# Altium PCB DC48V_DC24V_200W_V2.0.PcbDoc
Units mm, origin at the board's own origin, x right, y up, seen from the top; angles counter-clockwise.
Board outline 70 x 50 mm, 2 copper layers (Top Layer, Bottom Layer); 17 components, 6 nets, 53 pads, 20 vias.
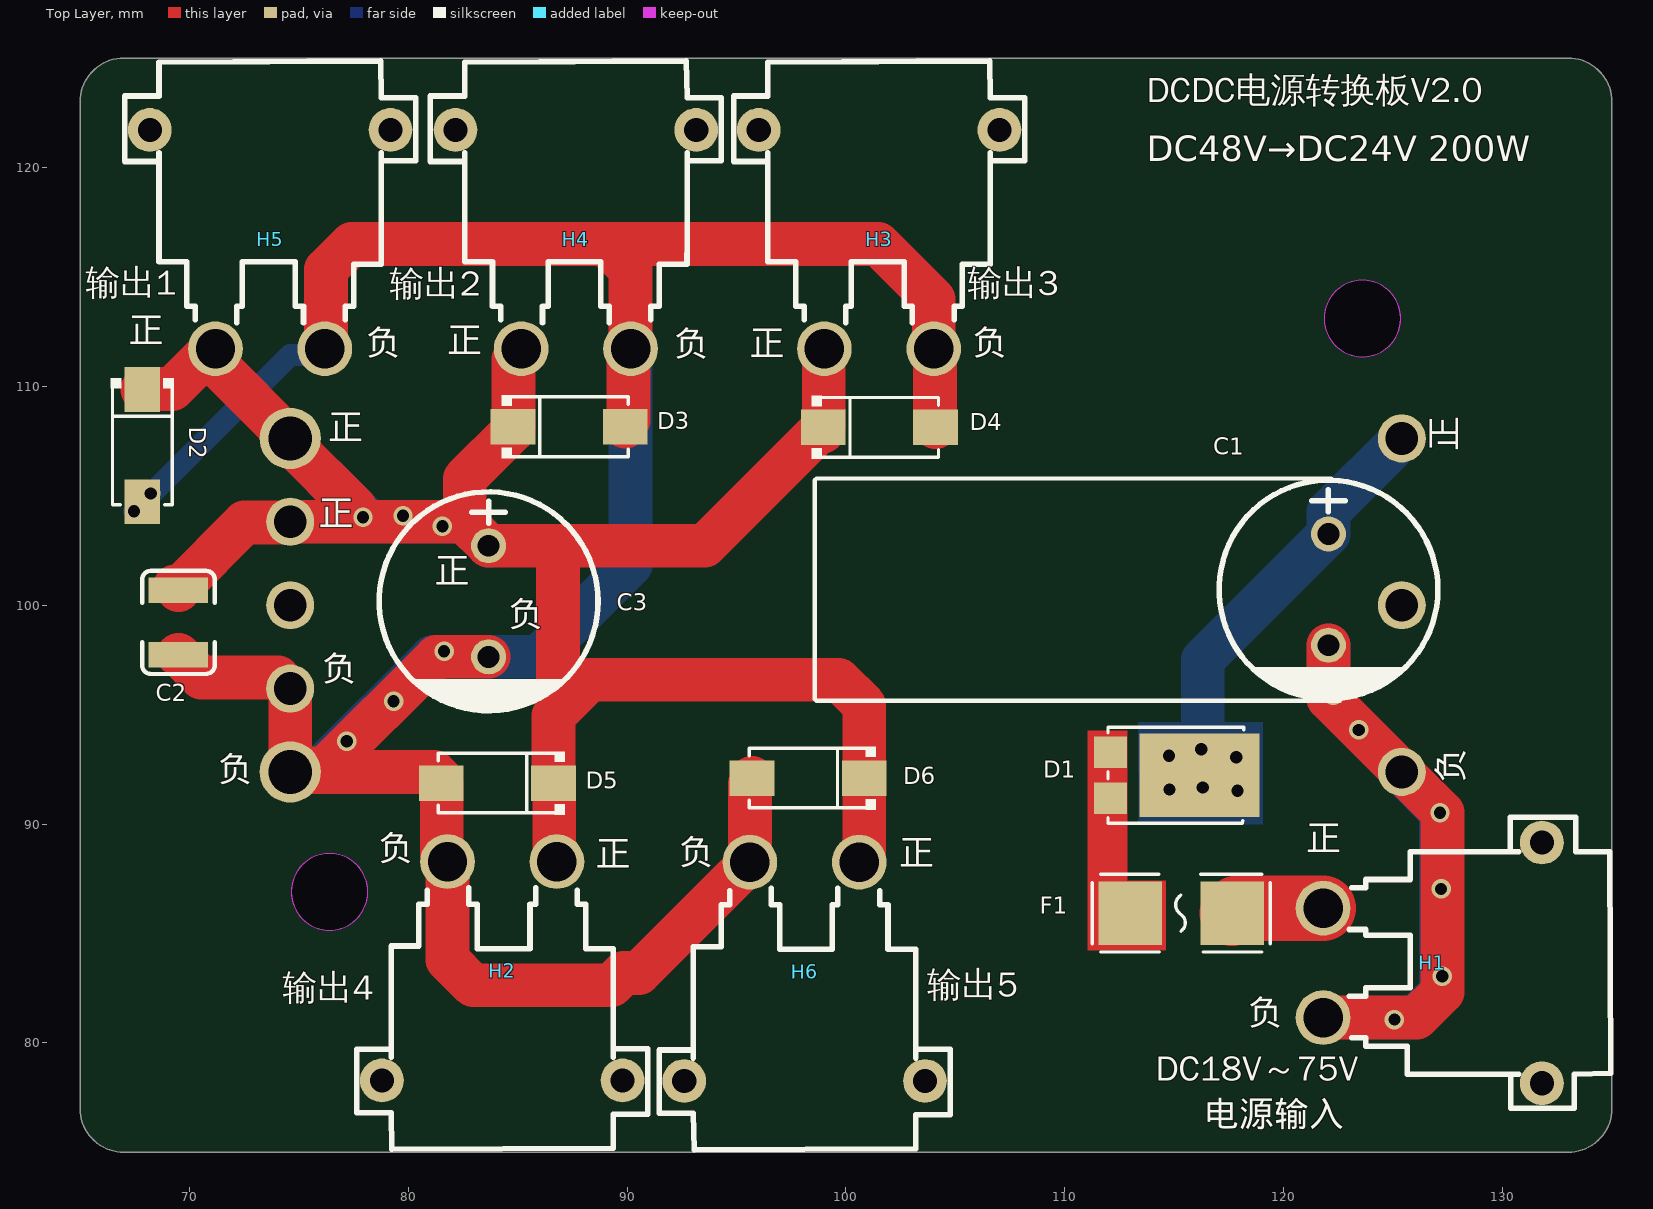
[diagram p0: Top Layer view]
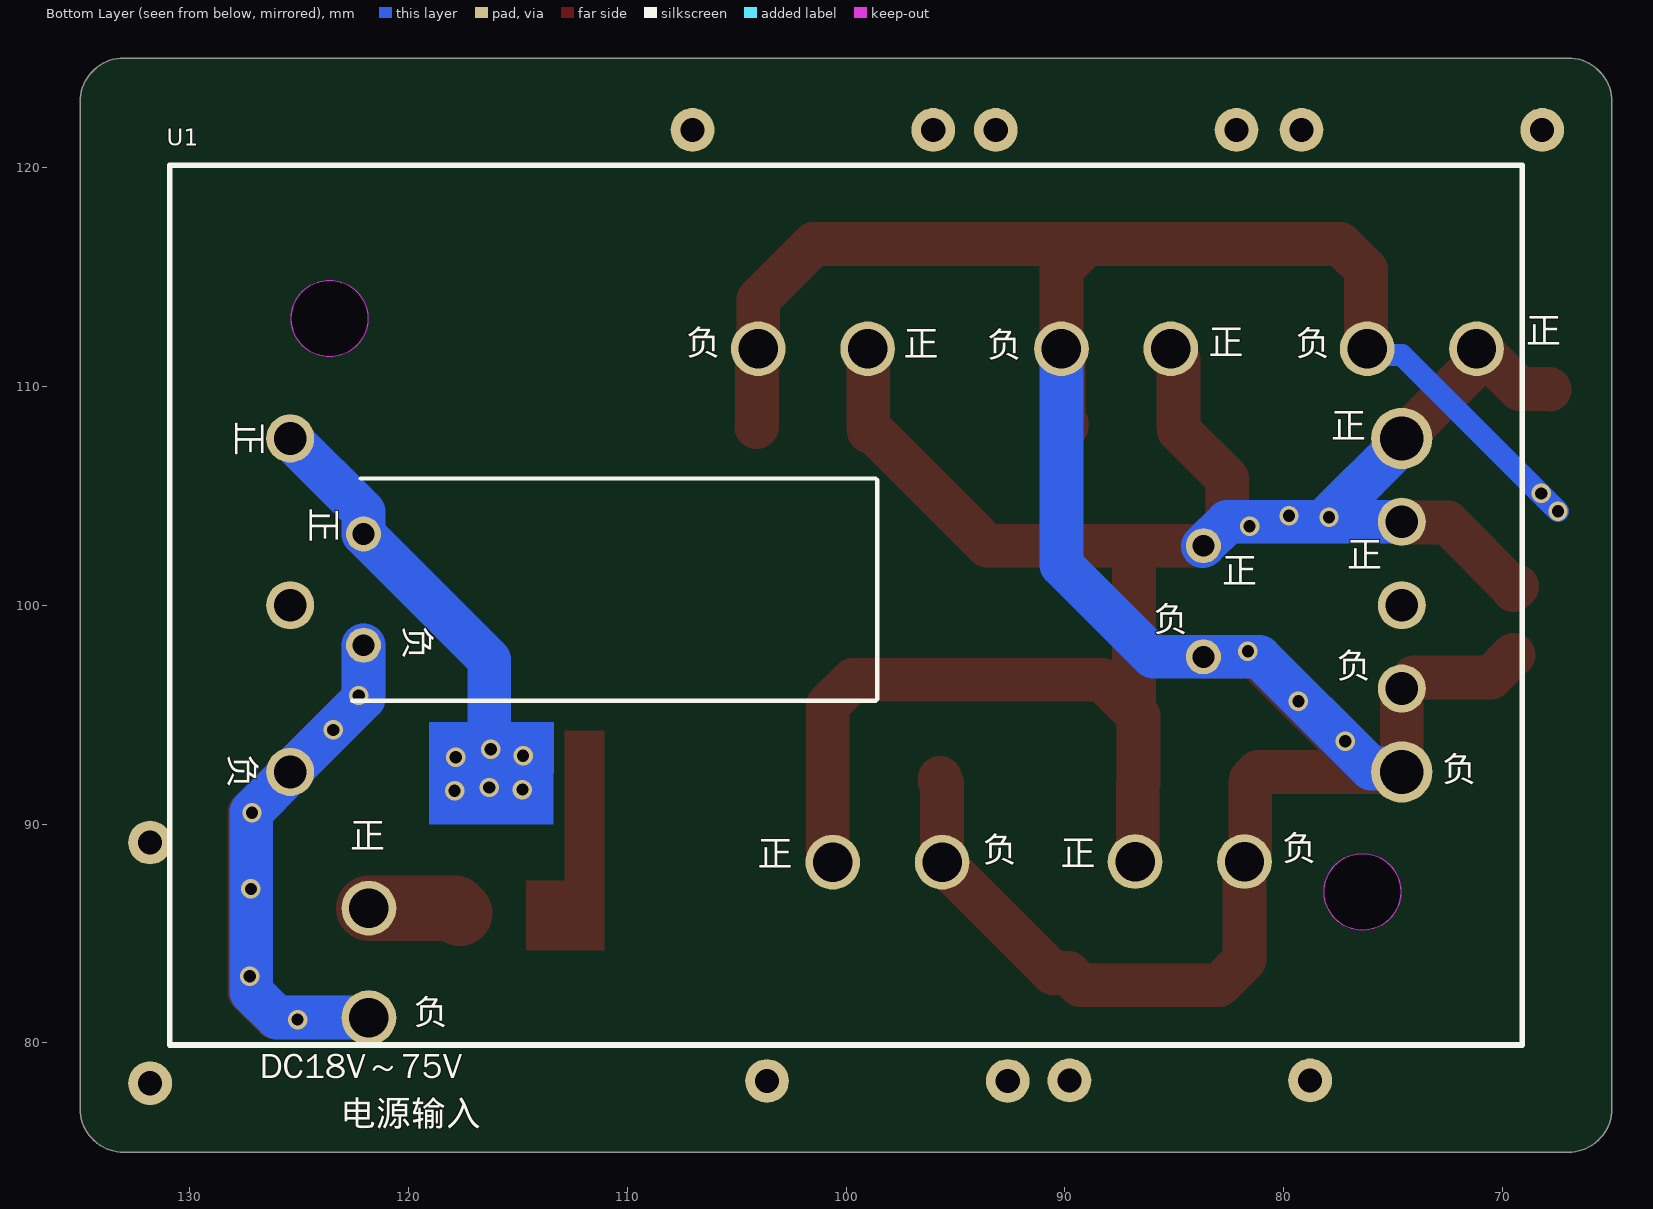
[diagram p1: Bottom Layer view, seen from below]

## Layer stack, top to bottom
Top Solder: solder mask 0.0102, Solder Resist, Dk 3.5
Top Layer: signal copper 0.0356
Dielectric 1: dielectric 0.32, FR-4, Dk 4.8
Bottom Layer: signal copper 0.0356
Bottom Solder: solder mask 0.0102, Solder Resist, Dk 3.5

## Board outline
67,75 cw(c67,77) 65,77 65,123 cw(c67,123) 67,125 133,125 cw(c133,123) 135,123 135,77 cw(c133,77) 133,75

## Design rules (kind name [scope] priority, off if disabled: settings)
Clearance [All] p1: gap=0.254 ignorepadtopadclearanceinfootprint=FALSE
PolygonConnect [All] p1: connectstyle=Relief reliefconductorwidth=0.254 reliefentries=4 polygonreliefangle="90 Angle" airgapwidth=0.254
RoutingVias [All] p1: holewidth=0.711 width=1.27 viastyle="Through Hole" minholewidth=0.711 minwidth=1.27 maxholewidth=0.711 maxwidth=1.27
SolderMaskExpansion [All] p1: expansion=0.102 istentingtop=FALSE
Width [All] p1: maxlimit=10 minlimit=0.254 preferedwidth=2
30 further rules are at their usual default settings.

## Classes and differential pairs
component class DC48V_DC24V_200W_V2.0: C1 C2 C3 D1 D2 D3 D4 D6 F1 H1 H2 H3 H4 H5 H6 U1

## Components (designator, comment, footprint, x,y, rotation, side; value= is the part's Value field where it differs from the comment)
C1 "80V 220uF D10*L20" CAP-TH_BD10.0-P5.00-D1.0-FD-WL 122.047,100.711 r270 top locked value=220uF
C2 "4.7uF" 1210_C 69.494,99.212 r90 top
C3 "50V 220uF D10*L13" CAP-TH_BD10.0-P5.00-D1.0-FD 83.668,100.178 r270 top value=220uF
D1 "SD10U100SL" TO-227B-SMD_L6.1-W4.3-LS7.0-RD 114.122,92.227 r180 top
D2 "SMAJ28A" SMA_L4.4-W2.8-LS5.4-RD 67.843,107.29 r270 top
D3 "SMAJ28A" SMA_L4.4-W2.8-LS5.4-RD 87.351,108.153 r0 top
D4 "SMAJ28A" SMA_L4.4-W2.8-LS5.4-RD 101.524,108.128 r0 top
D5 "SMAJ28A" SMA_L4.4-W2.8-LS5.4-RD 84.074,91.872 r180 top
D6 "SMAJ28A" SMA_L4.4-W2.8-LS5.4-RD 98.273,92.1 r180 top
F1 "0451020.MRL" FUSE-SMD_L6.1-W2.7 115.316,85.928 r180 top
H1 "XT30PW" CONN-TH_XT30PW-M 126.801,83.654 r90 top
H2 "XT30PW" CONN-TH_XT30PW-M 84.291,83.283 r0 top locked
H3 "XT30PW" CONN-TH_XT30PW-M 101.512,116.717 r180 top locked
H4 "XT30PW" CONN-TH_XT30PW-M 87.655,116.717 r180 top locked
H5 "XT30PW" CONN-TH_XT30PW-M 73.685,116.717 r180 top locked
H6 "XT30PW" CONN-TH_XT30PW-M 98.108,83.257 r0 top locked
U1 "URF4848QB-200WR3" PWRM-TH_URF48XXQB-200WR3 100,100 r180 bottom locked value=250kHz

## Footprints (in the part's own frame and the unit in brackets; to place one, negate y for a bottom-side part, rotate by r counter-clockwise, add the part's x,y. Pads: shape width x height; smd on the part's side, far side on the other; paste and mask are expansions set on the pad)
1210_C [mm]
  rect 1.16x2.72 smd: 1(-1.475,0) 2(1.475,0)
  silkscreen extent -2.36,-1.66 2.35,1.66, body extent -1.6,-1.25 1.6,1.25, height 1.3
CAP-TH_BD10.0-P5.00-D1.0-FD [mm]
  round 1.6 hole 1: 1(-2.54,0) 2(2.54,0)
  silkscreen extent -5,-5 5.08,5
CAP-TH_BD10.0-P5.00-D1.0-FD-WL [mm]
  round 1.6 hole 1: 1(-2.54,0) 2(2.54,0)
  silkscreen extent -5.08,-23.48 5.08,5
CONN-TH_XT30PW-M [mm]
  round 2.5 hole 1.8: 1(-2.5,5) 2(2.5,5)
  round 2 hole 1.1: 3(5.5,-5) 4(-5.5,-5)
  silkscreen extent -6.65,-8.15 6.65,3.81
FUSE-SMD_L6.1-W2.7 [mm]
  rect 2.91x2.905 smd paste-100 mask+0.051: 1(-2.33,0) 2(2.33,0)
  silkscreen extent -4.06,-1.78 4.06,1.78
PWRM-TH_URF48XXQB-200WR3 [mm]
  round 2.2 hole 1.5 paste-2539.97 mask+0.05: 1(-25.4,7.62) 2(-25.4,0) 3(-25.4,-7.62) 5(25.4,-3.81) 6(25.4,0) 7(25.4,3.81)
  round 2.8 hole 2 paste-2539.97 mask+0.05: 4(25.4,-7.62) 8(25.4,7.62)
  Keep-Out Layer board cut-out: 25.35,-13.1 25.35,-13.272 25.283,-13.611 25.151,-13.929 24.959,-14.216 24.715,-14.459 24.429,-14.651 24.11,-14.783 23.772,-14.85 23.428,-14.85 23.089,-14.783 22.771,-14.651 22.484,-14.459 22.241,-14.216 22.049,-13.929 21.917,-13.611 21.85,-13.272 21.85,-13.1 21.85,-12.928 21.917,-12.59 22.049,-12.271 22.241,-11.984 22.484,-11.741 22.771,-11.549 23.089,-11.417 23.428,-11.35 23.772,-11.35 24.11,-11.417 24.429,-11.549 24.715,-11.741 24.959,-11.984 25.151,-12.271 25.283,-12.59 25.35,-12.928 25.35,-13.1 25.35,-13.1
  Keep-Out Layer board cut-out: -21.85,13.1 -21.85,12.928 -21.917,12.59 -22.049,12.271 -22.241,11.984 -22.484,11.741 -22.771,11.549 -23.089,11.417 -23.428,11.35 -23.772,11.35 -24.11,11.417 -24.429,11.549 -24.715,11.741 -24.959,11.984 -25.151,12.271 -25.283,12.59 -25.35,12.928 -25.35,13.1 -25.35,13.272 -25.283,13.611 -25.151,13.929 -24.959,14.216 -24.715,14.459 -24.429,14.651 -24.11,14.783 -23.772,14.85 -23.428,14.85 -23.089,14.783 -22.771,14.651 -22.484,14.459 -22.241,14.216 -22.049,13.929 -21.917,13.611 -21.85,13.272 -21.85,13.1 -21.85,13.1
  Keep-Out Layer circle w0.025: c23.6,-13.1 r1.75
  Keep-Out Layer circle w0.025: c-23.6,13.1 r1.75
  Keep-Out Layer region: 25.35,-13.1 25.35,-13.272 25.283,-13.611 25.151,-13.929 24.959,-14.216 24.715,-14.459 24.429,-14.651 24.11,-14.783 23.772,-14.85 23.428,-14.85 23.089,-14.783 22.771,-14.651 22.484,-14.459 22.241,-14.216 22.049,-13.929 21.917,-13.611 21.85,-13.272 21.85,-13.1 21.85,-12.928 21.917,-12.59 22.049,-12.271 22.241,-11.984 22.484,-11.741 22.771,-11.549 23.089,-11.417 23.428,-11.35 23.772,-11.35 24.11,-11.417 24.429,-11.549 24.715,-11.741 24.959,-11.984 25.151,-12.271 25.283,-12.59 25.35,-12.928 25.35,-13.1 25.35,-13.1
  Keep-Out Layer region: -21.85,13.1 -21.85,12.928 -21.917,12.59 -22.049,12.271 -22.241,11.984 -22.484,11.741 -22.771,11.549 -23.089,11.417 -23.428,11.35 -23.772,11.35 -24.11,11.417 -24.429,11.549 -24.715,11.741 -24.959,11.984 -25.151,12.271 -25.283,12.59 -25.35,12.928 -25.35,13.1 -25.35,13.272 -25.283,13.611 -25.151,13.929 -24.959,14.216 -24.715,14.459 -24.429,14.651 -24.11,14.783 -23.772,14.85 -23.428,14.85 -23.089,14.783 -22.771,14.651 -22.484,14.459 -22.241,14.216 -22.049,13.929 -21.917,13.611 -21.85,13.272 -21.85,13.1 -21.85,13.1
  silkscreen extent -30.9,-20.1 30.9,20.1
SMA_L4.4-W2.8-LS5.4-RD [mm]
  rect 2.046x1.62 smd: 1(-2.565,0) 2(2.565,0)
  silkscreen extent -3.08,-1.44 2.7,1.44, body extent -2.6,-1.4 2.6,1.5, height 2.3
TO-227B-SMD_L6.1-W4.3-LS7.0-RD [mm]
  rect 1.5x1.422 smd: 1(2.033,-1.05) 2(2.033,1.05)
  rect 5.5x3.8 smd: 3(-2.033,0)
  silkscreen extent -4.05,-2.2 2.15,2.2

## Part data
C1: library part ERF1BM221G20OT, Equivalent Series Resistance(ESR)=-, JLCPCB Part Class="Extended Part", LCSC Part Name="220uF ±20% 80V", Manufacturer=AISHI(艾华集团), Tolerance=±20%, Voltage Rating=80V, Add into BOM=yes, Convert to PCB=yes, Datasheet=https://item.szlcsc.com/datasheet/ERF1BM221G20OT/107732.html, Device=ERF1BM221G20OT, Diameter=10mm, Height - Seated (Max)=20mm, Lifetime=5000hrs@105℃, Manufacturer Part=ERF1BM221G20OT, Pin Spacing=5mm, Ripple Current=-, Supplier=LCSC, Supplier Footprint=插件,D10xL20mm, Supplier Part=C106516, Symbol=ERF1BM221G20OT
C2: library part "1210 4.7uf", "100V 4.7uf 1210", JLCPCB Part Class="Extended Part", LCSC Part Name="4.7uF ±10% 100V", Manufacturer=FH(风华), Manufacturer Part=1210B475K101NT, Temperature Coefficient=X7R, Tolerance=±10%, Voltage Rated=100V, Add into BOM=yes, Convert to PCB=yes, Datasheet=https://atta.szlcsc.com/upload/public/pdf/source/20210617/C2840282_5B7AB5BFD77495008CFAB3FC2796A0E9.pdf, Device=1210B475K101NT, Supplier=LCSC, Supplier Footprint=1210, Supplier Part=C2840282, Symbol=1210B475K101NT
C3: library part ERS1HM221G13OT, JLCPCB Part Class="Extended Part", LCSC Part Name="220uF ±20% 50V", Manufacturer=AISHI(艾华集团), Tolerance=±20%, Voltage Rating=50V, Add into BOM=yes, Convert to PCB=yes, Datasheet=https://item.szlcsc.com/datasheet/ERS1HM221G13OT/356226.html, Device=ERS1HM221G13OT, Diameter=10mm, Height - Seated (Max)=13mm, Lifetime=7000hrs@105℃, Manufacturer Part=ERS1HM221G13OT, Pin Spacing=5mm, Supplier=LCSC, Supplier Footprint=插件,D10xL13mm, Supplier Part=C383039, Symbol=ERS1HM221G13OT
D1: Forward Voltage (Vf@If)=570mV@10A, JLCPCB Part Class="Extended Part", LCSC Part Name="电压:100V 电流:10A", Manufacturer=LGE(鲁光), Rectified Current=10A, Reverse Leakage Current (Ir)=200uA@100V, Reverse Voltage (Vr)=100V, Add into BOM=yes, Convert to PCB=yes, Datasheet=https://atta.szlcsc.com/upload/public/pdf/source/20211009/BD93C46FB22A14806A56CC8AAFB52095.pdf, Device=SD10U100SL, Diode Configuration=独立式, Manufacturer Part=SD10U100SL, Supplier=LCSC, Supplier Footprint=TO-277, Supplier Part=C2903879, Symbol=SD10U100SL
D2 D3 D4 D5 D6: library part SMAJ28A_C148227, Clamping Voltage=45.4V, JLCPCB Part Class="Extended Part", Manufacturer=Littelfuse(美国力特), Operating Temperature=-65℃~+150℃, Peak Pulse Current (Ipp)=8.8A@10/1000us, Peak Pulse Power Dissipation (Ppp)=400W@10/1000us, Reverse Leakage Current (Ir)=1uA, Reverse Stand-Off Voltage (Vrwm)=28V, Voltage - Breakdown=34.4V, Add into BOM=yes, Convert to PCB=yes, Datasheet=https://item.szlcsc.com/datasheet/SMAJ28A/159560.html, Device=SMAJ28A_C148227, LCSC Part Name=SMAJ28A, level of protection="IEC 61000-4-4；IEC 61000-4-2", Manufacturer Part=SMAJ28A, polarity=单向, Supplier=LCSC, Supplier Footprint=SMA(DO-214AC), Supplier Part=C148227, Symbol=SMAJ28A_C148227, Type=TVS
F1: Current Rating=20A, Interrupt Rating=150A；100A, JLCPCB Part Class="Extended Part", LCSC Part Name=65V贴片式保险丝, Manufacturer=Littelfuse(美国力特), Operating Temperature=-55℃~+125℃, Voltage Rating (AC)=65V, Add into BOM=yes, Convert to PCB=yes, Datasheet=https://item.szlcsc.com/datasheet/0451020.MRL/190373.html, Device=0451020.MRL, Manufacturer Part=0451020.MRL, Supplier=LCSC, Supplier Footprint=2410, Supplier Part=C178980, Symbol=0451020.MRL, Type=贴片式保险丝, Voltage Rating (DC)=65V
H1 H2 H3 H4 H5 H6: library part XT30PW-M30.G.Y, Colour=-, contact resistance=1.2mΩ, JLCPCB Part Class="Extended Part", LCSC Part Name="AMASS(艾迈斯)航模插头 卧式弯脚 XT30PW-M公头", Manufacturer=AMASS(艾迈斯), RatedCurrent=15A, RatedVoltage="DC 500V", Add into BOM=yes, Belt length=-, Convert to PCB=yes, Datasheet=https://atta.szlcsc.com/upload/public/pdf/source/20220222/6A9F22F7850E25B33E1BE430ADF8560B.pdf, Device=XT30PW-M30.G.Y, FlameRetardantGrade=-, Input=-, InsulationMaterial=-, Interface=-, InterfaceType=公头, Manufacturer Part=XT30PW-M30.G.Y, MaximumCurrent=-, MetalMaterial=-, NumberOfUSBHoles=-, Output=-, Power=-, RecommendedWireGauge=16/18/20AWG, Size=-, specifications=2pin, Supplier=LCSC, Supplier Footprint=-, Supplier Part=C431092, Symbol=XT30PW-M, Type=航模插头, Type1=-
U1: Capacitive Load(Max)=450uF, Isolation Voltage(Vrms)=2.25kV, JLCPCB Part Class="Extended Part", Manufacturer=MORNSUN(金升阳), Operating Temperature=-40℃~+85℃, Output Current(Max)=4.2A, Output Power=200W, Output Voltage=48V, Voltage - Supply=18V~75V, Add into BOM=yes, Conversion Efficiency=91%, Convert to PCB=yes, Datasheet=https://item.szlcsc.com/datasheet/URF4848QB-200WR3/7661650.html, Device=URF4848QB-200WR3, Features=欠压保护；短路保护；过流保护；过压保护；过热保护, Height=12.7mm, LCSC Part Name=URF4848QB-200WR3, Length=61.8mm, Manufacturer Part=URF4848QB-200WR3, Ripple Noise=150mVp-p, Supplier=LCSC, Supplier Footprint=DIP,61.8x40.2mm, Supplier Part=C6705194, Symbol=URF4848QB-200WR3, Width=40.2mm

## Via types
v1: diameter 0.889, hole 0.559, Top Layer to Bottom Layer, 20 vias

## Nets (pads, with @x,y where several pads share a name; then routed paths per layer and width w, separated by ;. In a path a pad name is that pad's centre, name@x,y a point inside that pad or via, vN(x,y) a via of type N, cw(c..) or ccw(c..) an arc to the next point about the centre after c; other vN are vias at no path point)
24V+: C2.2 C3.1 D2.1 D3.1 D4.1 D5.1 D6.1 H2.2 H3.2 H4.2 H5.2 H6.2 U1.7 U1.8 | length 112.9
  Top Layer w2: D2.1 67.867,109.878 69.212,109.878 71.05,111.717 H5.2 71.281,111.621 71.281,110.939 U1.8 74.6,107.403 77.597,104.407 v1@77.597,103.81 ; C2.2@69.329,100.852 C2.2 69.494,100.747 72.519,103.772 74.562,103.772 U1.7 v1@77.597,103.81 ; H4.2 85.155,111.581 84.808,111.234 84.808,108.176 D3.1 84.785,107.986 82.575,105.776 82.575,103.81 ; H2.2 86.791,88.418 86.663,88.546 86.663,91.849 D5.1 86.639,94.945 86.839,95.145 ; H3.2 98.982,111.686 98.982,108.151 D4.1 98.958,107.961 98.935,107.938 98.768,107.938 93.548,102.718 86.823,102.718 ; H6.2 100.608,88.393 100.838,88.622 D6.1 100.838,95.425 99.666,96.596 88.29,96.596 86.839,95.145 ; v1@77.597,103.81 82.575,103.81 ; 82.575,103.81 C3.1 86.823,102.718 ; 86.823,102.718 86.839,102.701 86.839,95.145
  Bottom Layer w2: U1.7 v1@78.194,103.81 ; U1.8 74.6,107.403 v1@78.194,103.81 ; C3.1@83.693,102.692 C3.1 82.575,103.81 v1@78.194,103.81
  other v1: 81.559,103.607 77.927,104.013 79.756,104.089
24V-: C2.1 C3.2 D2.2 D3.2 D4.2 D5.2 D6.2 H2.1 H3.1 H4.1 H5.1 H6.1 U1.4 U1.5 | length 145.6
  Top Layer w2: C2.1 70.534,96.698 74.038,96.698 74.546,96.19 U1.5 U1.4 ; H5.1 76.241,111.772 76.241,115.338 77.413,116.51 88.984,116.51 ; C3.2 81.28,97.638 76.175,92.533 74.753,92.533 U1.4 ; D3.2 89.916,108.32 90.06,108.464 90.06,111.621 H4.1 90.155,115.338 88.984,116.51 ; D6.2 95.707,91.934 95.608,91.835 H6.1 90.536,83.185 89.84,83.185 89.281,82.626 82.962,82.626 81.791,83.798 H2.1 81.791,88.418 81.532,88.677 81.532,91.849 D5.2 81.509,92.039 81.167,92.38 U1.4 ; D4.2 104.066,108.151 104.066,111.663 H3.1 104.012,113.971 101.473,116.51 88.984,116.51
  Bottom Layer w1: v1(67.462,104.292) 74.6,111.43 75.898,111.43 H5.1
  Bottom Layer w2: U1.4 74.753,92.533 75.998,92.533 81.102,97.638 C3.2 85.954,97.638 90.155,101.839 H4.1
  other v1: 77.191,93.777 79.324,95.606 81.636,97.892 68.224,105.105
NetC1_1: C1.1 D1.3 U1.1 | length 19.7
  Bottom Layer w2: v1(116.307,91.669) 116.307,97.511 C1.1 122.047,104.267 U1.1
  other v1: 117.886,91.523 114.787,91.573 117.835,93.047 114.757,93.116 116.234,93.412
NetC1_2: C1.2 H1.1 U1.3 | length 47.8
  Top Layer w2: H1.1 126.082,81.154 127.254,82.326 127.254,90.526 U1.3 122.047,95.733 C1.2
  Bottom Layer w2: H1.1 126.006,81.154 127.178,82.325 127.178,90.548 125.4,92.326 U1.3 122.047,95.733 C1.2
  other v1: 125.061,81.065 127.245,83.046 127.194,87.034 127.143,90.511 123.435,94.298 122.267,95.873
NetD1_1: D1.1 D1.2 F1.2
NetF1_1: F1.1 H1.2 | length 4.2
  Top Layer w3: F1.1 117.872,86.154 H1.2
pads on no net: H1.3 H1.4 H2.3 H2.4 H3.3 H3.4 H4.3 H4.4 H5.3 H5.4 H6.3 H6.4 U1.2 U1.6

## Other copper
Top Layer:
  region net NetD1_1: 111.049,94.259 111.049,84.226 114.579,84.226 114.605,84.252 114.605,87.401 112.801,87.401 112.852,87.452 112.852,94.259
Bottom Layer:
  region net NetC1_1: 113.36,94.64 113.386,89.992 119.05,89.992 119.05,94.64

## Silkscreen, mask and mechanical layers (free items; w line width, h text height)
Top Overlay:
  text "DCDC电源转换板V2.0" at 113.741,122.587 h2
  text "DC48V→DC24V 200W" at 113.741,119.886 h2
  text "输出1" at 65.253,113.792 h2
  text "输出3" at 105.566,113.779 h2
  text "输出2" at 79.15,113.754 h2
  text "正" at 67.222,111.616 h2
  text "正" at 81.777,111.158 h2
  text "负" at 78.065,111.065 h2
  text "负" at 105.767,111.049 h2
  text "负" at 92.136,111.014 h2
  text "正" at 95.594,111.031 h2
  text "正" at 76.332,107.203 h2
  text "正" at 128.267,107.036 h2 r90
  text "正" at 75.895,103.254 h2
  text "正" at 81.204,100.638 h2
  text "负" at 84.558,98.653 h2
  text "负" at 76.049,96.164 h2
  text "负" at 128.575,91.873 h2 r90
  text "负" at 71.299,91.567 h2
  text "正" at 121.031,88.421 h2
  text "负" at 78.624,87.951 h2
  text "负" at 92.365,87.773 h2
  text "正" at 102.427,87.74 h2
  text "正" at 88.558,87.714 h2
  text "输出5" at 103.708,81.712 h2
  text "输出4" at 74.27,81.585 h2
  text "负" at 118.352,80.435 h2
  text "DC18V～75V" at 114.156,77.874 h2
  text "电源输入" at 116.366,75.793 h2
Bottom Overlay:
  text "正" at 68.91,111.611 h2
  text "正" at 83.414,111.077 h2
  text "负" at 107.314,111.049 h2
  text "负" at 79.475,111.023 h2
  text "正" at 97.358,111.001 h2
  text "负" at 93.572,110.972 h2
  text "正" at 128.216,108.407 h2 r90
  text "正" at 77.824,107.255 h2
  text "正" at 124.812,104.445 h2 r90
  text "正" at 77.089,101.375 h2
  text "正" at 82.804,100.638 h2
  text "负" at 120.509,99.072 h2 r90
  text "负" at 85.952,98.425 h2
  text "负" at 77.596,96.291 h2
  text "负" at 128.499,93.217 h2 r90
  text "负" at 72.77,91.567 h2
  text "正" at 122.657,88.522 h2
  text "负" at 80.085,87.96 h2
  text "负" at 93.775,87.884 h2
  text "正" at 90.195,87.735 h2
  text "正" at 104.038,87.709 h2
  text "负" at 119.785,80.467 h2
  text "DC18V～75V" at 126.797,78.002 h2
  text "电源输入" at 123.063,75.819 h2
Mechanical 1:
  the board outline again, w0.01